# EAGLE board I2C_Servo v2 (EAGLE 7.2.0)
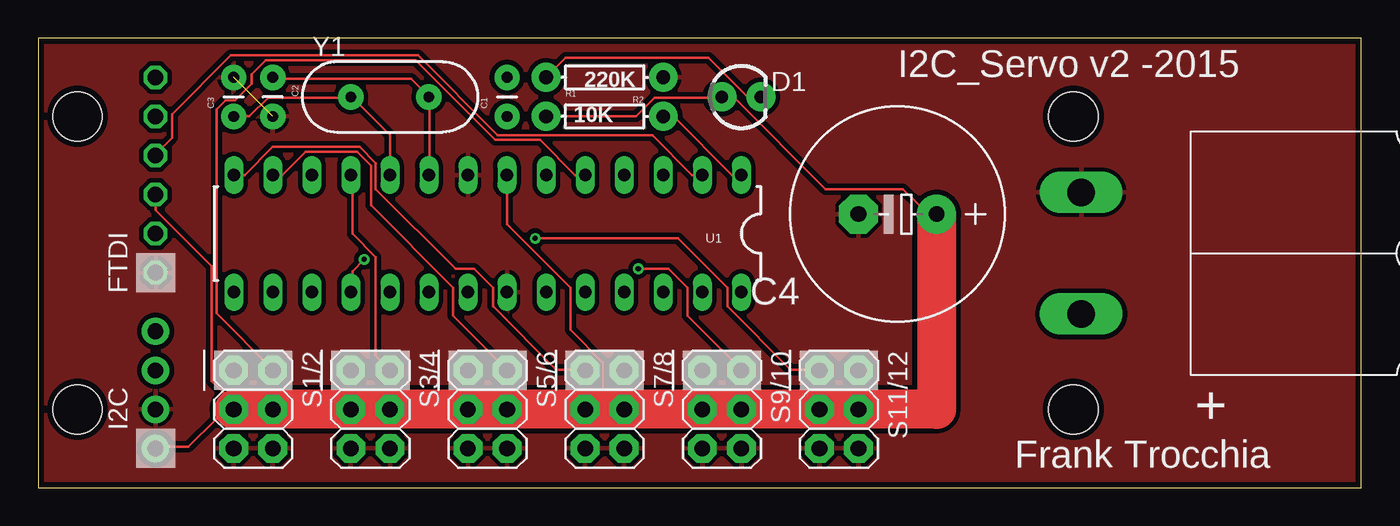
[diagram p0: board, top side]
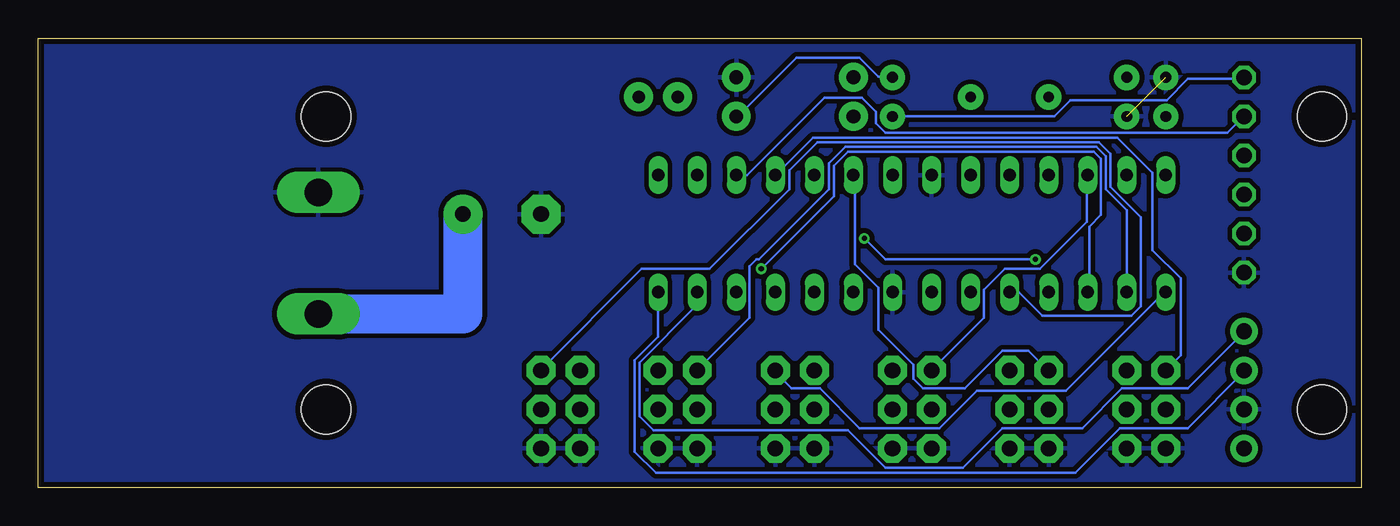
[diagram p1: board, bottom side, seen from below]

Size 86.03 x 29.2 mm. Coordinates in mm from the lower left corner, seen from the top.
Outline: 0,0 86.03,0 86.03,29.2 0,29.2 0,0
Copper layers (1*16): Top 0.0356mm / dielectric 1.5011mm / Bottom 0.0356mm
Design rules "LaenPCBOrder": minimum track width 6mil, minimum drill 13mil, track to track 6mil, track to pad 6mil, pad to pad 6mil, via to via 6mil, smd to smd 6mil, copper to edge 15mil, drill to drill 6mil, minimum pad ring 7mil, minimum via ring 7mil, stop-mask expansion 3mil, vias tented up to drill 0mil, thermal gap 10mil
Holes 3.2 mm at 67.31,24.13 67.31,5.08 2.54,24.13 2.54,5.08

## Footprints (pad centres in the part's own frame; a part is rotated, then mirrored left to right if it is on the bottom)
CAP-PTH-SMALL = drill 0.7 pad 1.651: 1 0,0; 2 2.54,0
E5-13 = drill 1.016 pad 2.54: + -2.54,0 | drill 1.016 pad 2.54 octagon: - 2.54,0
LED3MM = drill 0.813 pad 1.88: A -1.27,0; K 1.27,0
1X06-CLEAN = drill 1.016 octagon: 1 -6.35,0; 2 -3.81,0; 3 -1.27,0; 4 1.27,0; 5 3.81,0; 6 6.35,0
1X04-CLEANBIG = drill 1.016 pad 1.778: 1 -3.81,0; 2 -1.27,0; 3 1.27,0; 4 3.81,0
POWERPOLE_PAIR_25A_HORIZ_G2 = drill 1.8 long: BLACK -3.95,-7.1; RED 3.95,-7.1
AXIAL-0.3 = drill 0.9 pad 1.88: P$1 -3.81,0; P$2 3.81,0
2X03 = drill 1.016 pad 1.88 octagon: 1 -2.54,-1.27; 2 -2.54,1.27; 3 0,-1.27; 4 0,1.27; 5 2.54,-1.27; 6 2.54,1.27
DIL28-3 = drill 0.813 long: 1 -16.51,-3.81; 2 -13.97,-3.81; 3 -11.43,-3.81; 4 -8.89,-3.81; 5 -6.35,-3.81; 6 -3.81,-3.81; 7 -1.27,-3.81; 8 1.27,-3.81; 9 3.81,-3.81; 10 6.35,-3.81; 11 8.89,-3.81; 12 11.43,-3.81; 13 13.97,-3.81; 14 16.51,-3.81; 15 16.51,3.81; 16 13.97,3.81; 17 11.43,3.81; 18 8.89,3.81; 19 6.35,3.81; 20 3.81,3.81; 21 1.27,3.81; 22 -1.27,3.81; 23 -3.81,3.81; 24 -6.35,3.81; 25 -8.89,3.81; 26 -11.43,3.81; 27 -13.97,3.81; 28 -16.51,3.81
HC49US = drill 0.7 pad 1.651: 1 -2.54,0; 2 2.54,0

## Placement (x,y rotation side)
C1  .1uF  [CAP-PTH-SMALL]  30.48,24.13 90 top
C2  2pF  [CAP-PTH-SMALL]  15.24,26.67 270 top
C3  20pF  [CAP-PTH-SMALL]  12.7,24.13 90 top
C4  4700uF  [E5-13]  55.88,17.78 180 top
D1  [LED3MM]  45.72,25.4 0 top
FTDI  [1X06-CLEAN]  7.62,20.32 90 top
I2C  [1X04-CLEANBIG]  7.62,6.35 90 top
J1  POWERPOLE_POWER25A_HORIZONTAL_G2  [POWERPOLE_PAIR_25A_HORIZ_G2]  74.93,15.24 270 top
R1  10K  [AXIAL-0.3]  36.83,24.13 0 top
R2  220K  [AXIAL-0.3]  36.83,26.67 180 top
S1/2  [2X03]  13.97,5.08 270 top
S3/4  [2X03]  21.59,5.08 270 top
S5/6  [2X03]  29.21,5.08 270 top
S7/8  [2X03]  36.83,5.08 270 top
S9/10  [2X03]  44.45,5.08 270 top
S11/12  [2X03]  52.07,5.08 270 top
U1  ATMEGA328P_PDIP  [DIL28-3]  29.21,16.51 180 top
Y1  [HC49US]  22.86,25.4 0 top

## Library data of the parts
C1-C3 R1 R2 = SparkFun-Passives
C4 FTDI I2C = adafruit
D1 = SparkFun-LED
J1 = powerpoles
S1/2 S3/4 S5/6 S7/8 S9/10 S11/12 = SparkFun-Connectors
U1 = SparkFun-DigitalIC
Y1 = SparkFun-FreqCtrl

## Nets
+5V: C4.+ D1.A FTDI.3 I2C.1 J1.RED R1.P$1 S1/2.3 S1/2.4 S3/4.3 S3/4.4 S5/6.3 S5/6.4 S7/8.3 S7/8.4 S9/10.3 S9/10.4 S11/12.3 S11/12.4 U1.7
GND: C2.2 C3.2 C4.- FTDI.1 I2C.2 J1.BLACK R2.P$1 S1/2.5 S1/2.6 S3/4.5 S3/4.6 S5/6.5 S5/6.6 S7/8.5 S7/8.6 S9/10.5 S9/10.6 S11/12.5 S11/12.6 U1.8 U1.22
N$1: C1.1 FTDI.6
N$2: C2.1 U1.9 Y1.2
N$3: C3.1 U1.10 Y1.1
N$5: D1.K R2.P$2
PIN2: S1/2.1 U1.4
PIN3: S1/2.2 U1.5
PIN4: S3/4.1 U1.6
PIN5: S3/4.2 U1.11
PIN6: S5/6.1 U1.12
PIN7: S5/6.2 U1.13
PIN8: S7/8.1 U1.14
PIN9: S7/8.2 U1.15
PIN10: S9/10.1 U1.16
PIN11: S9/10.2 U1.17
PIN12: S11/12.1 U1.18
PIN13: S11/12.2 U1.19
RST: C1.2 R1.P$2 U1.1
RX->TX: FTDI.5 U1.3
SCL: I2C.3 U1.28
SDA: I2C.4 U1.27
TX->RX: FTDI.4 U1.2

## Tracks (layer width: path | path; a pad name or v marks a point on that pad's centre or on a via)
+5V
  Top 0.152: R1.P$1 38.86,24.13 40.08,25.35 44.35,25.35 D1.A 44.5,25.35 45.26,25.35 51.21,19.41 56.24,19.41 57.3,18.34 C4.+ | U1.7 30.48,17.12 34.59,13 34.59,10.26 36.73,8.13 36.73,5.08 | FTDI.3 7.62,18.03 11.28,14.38 11.28,6.91 12.04,6.15 S1/2.3 11.58,4.47 9.75,2.64 7.62,2.64 I2C.1
  Top 2.54: C4.+ 58.42,5.08 S11/12.4 S11/12.3 S9/10.4 S9/10.3 S7/8.4 36.73,5.08 S7/8.3 S5/6.4 S5/6.3 S3/4.4 S3/4.3 S1/2.4 S1/2.3
  Bottom 2.54: J1.RED 58.42,11.29 C4.+
GND  (1 unrouted)
  pour Top (isolate 0.305): 0.08,29.21 85.95,29.21 85.95,0 0.08,0
  pour Bottom (isolate 0.305): 0.08,29.21 85.95,29.21 85.95,0 0.08,0
N$1
  Bottom 0.152: C1.1 19.96,24.13 18.9,25.2 12.65,25.2 11.28,26.57 7.62,26.57 FTDI.6
N$2
  Top 0.152: U1.9 25.45,20.32 25.45,25.35 Y1.2 24.23,26.57 15.24,26.57 C2.1
N$3
  Top 0.152: U1.10 22.86,22.91 20.42,25.35 Y1.1 20.27,25.35 14.94,25.35 13.72,24.13 C3.1
N$5
  Top 0.152: R2.P$2 34.29,27.94 43.59,27.94 46.03,25.5 46.94,25.5 D1.K
PIN2
  Bottom 0.152: U1.4 35.66,22.76 15.85,22.76 13.56,20.47 13.56,15.44 11.73,13.61 11.73,8.59 S1/2.1
PIN3
  Top 0.152: U1.5 34.9,20.32 32.61,22.61 29.72,22.61 24.54,27.79 14.78,27.79 13.87,26.87 13.87,26.26 12.8,25.2 12.19,25.2 11.58,24.59 11.58,11.33 15.24,7.67 S1/2.2
PIN4
  Bottom 0.152: U1.6 32.92,20.32 32.92,14.53 31.39,13 31.39,10.26 29.11,7.98 29.11,7.06 28.5,6.45 25.76,6.45 23.32,8.89 21.64,8.89 20.42,7.67 S3/4.1
PIN5
  Top 0.152: U1.11 20.42,20.32 20.42,16.51 21.95,14.99 21.95,8.59 22.86,7.67 S3/4.2
PIN6
  Bottom 0.152: S5/6.1 24.54,11.02 24.54,12.85 23.16,14.22 20.88,14.22 17.83,17.27 17.83,20.32 U1.12
PIN7
  Top 0.152: U1.13 15.85,20.32 17.37,21.84 20.73,21.84 21.64,20.93 21.64,18.34 26.97,13 26.97,11.18 30.48,7.67 S5/6.2
PIN8
  Top 0.152: U1.14 13.41,20.32 15.24,22.15 20.88,22.15 21.95,21.08 21.95,19.41 27.13,14.22 28.35,14.22 29.57,13 29.57,11.79 33.68,7.67 35.51,7.67 S7/8.1
PIN9
  Bottom 0.152: U1.15 12.8,12.7 19.2,6.3 24.99,6.3 27.43,3.86 32.61,3.86 35.2,6.45 37.03,6.45 38.1,7.52 S7/8.2
PIN10
  Bottom 0.152: U1.16 15.24,18.03 16.61,19.41 16.61,21.54 17.22,22.15 33.53,22.15 34.59,21.08 34.59,19.41 39.17,14.83 39.32,14.83 39.78,14.38 39.78,11.02 S9/10.1
PIN11  (via drill 0.33)
  Top 0.152: v39.01,14.22 41,14.22 42.22,13 42.22,11.18 45.72,7.67 S9/10.2
  Bottom 0.152: v39.01,14.22 34.29,18.95 34.29,20.93 33.38,21.84 17.37,21.84 16.92,21.39 16.92,17.73 17.68,16.97 17.68,12.7 U1.17
PIN12  (via drill 0.33)
  Top 0.152: v21.18,14.83 20.42,14.07 20.42,12.7 U1.18 | v32.31,16.21 41.61,16.21 44.81,13 44.81,11.79 48.92,7.67 50.75,7.67 S11/12.1
  Bottom 0.152: v21.18,14.83 30.94,14.83 v32.31,16.21
PIN13
  Bottom 0.152: U1.19 22.25,12.7 20.73,11.18 14.94,11.18 14.33,11.79 14.33,17.58 16.31,19.56 16.31,21.69 17.07,22.45 35.36,22.45 37.19,20.62 37.19,19.41 42.37,14.22 46.79,14.22 53.34,7.67 S11/12.2
RST
  Top 0.152: U1.1 45.11,20.32 41.3,24.13 R1.P$2
  Bottom 0.152: C1.2 30.48,26.72 31.39,26.72 32.61,27.94 36.73,27.94 40.54,24.13 R1.P$2
RX->TX
  Bottom 0.152: U1.3 39.93,20.32 34.9,25.35 32.46,25.35 31.55,24.43 31.55,23.67 30.94,23.06 8.69,23.06 FTDI.5
SCL
  Bottom 0.152: U1.28 45.72,9.8 47.24,8.28 47.24,2.34 45.87,0.97 18.59,0.97 15.7,3.86 11.28,3.86 7.62,7.52 I2C.3
SDA
  Bottom 0.152: U1.27 43.28,12.7 43.28,11.79 46.94,8.13 46.94,4.62 46.03,3.71 33.38,3.71 30.94,1.27 25.91,1.27 23.32,3.86 18.14,3.86 15.54,6.45 11.28,6.45 7.62,10.11 I2C.4
TX->RX
  Top 0.152: U1.2 42.52,20.32 39.93,22.91 29.87,22.91 24.69,28.09 12.5,28.09 8.69,24.28 8.69,22.76 7.62,21.69 FTDI.4

## Text on the board
_tsilk: I2C_Servo v2 -2015 | Frank Trocchia